# Altium PCB STM32F3_DRV8323RS.PcbDoc (part 2 of 2)
Units mil, origin at the board's own origin, x right, y up, seen from the top; angles counter-clockwise.
Board outline 1929.13 x 1057.48 mil, 4 copper layers (Top Layer, Mid-Layer 1, Mid-Layer 2, Bottom Layer); 100 components, 83 nets, 400 pads, 171 vias.
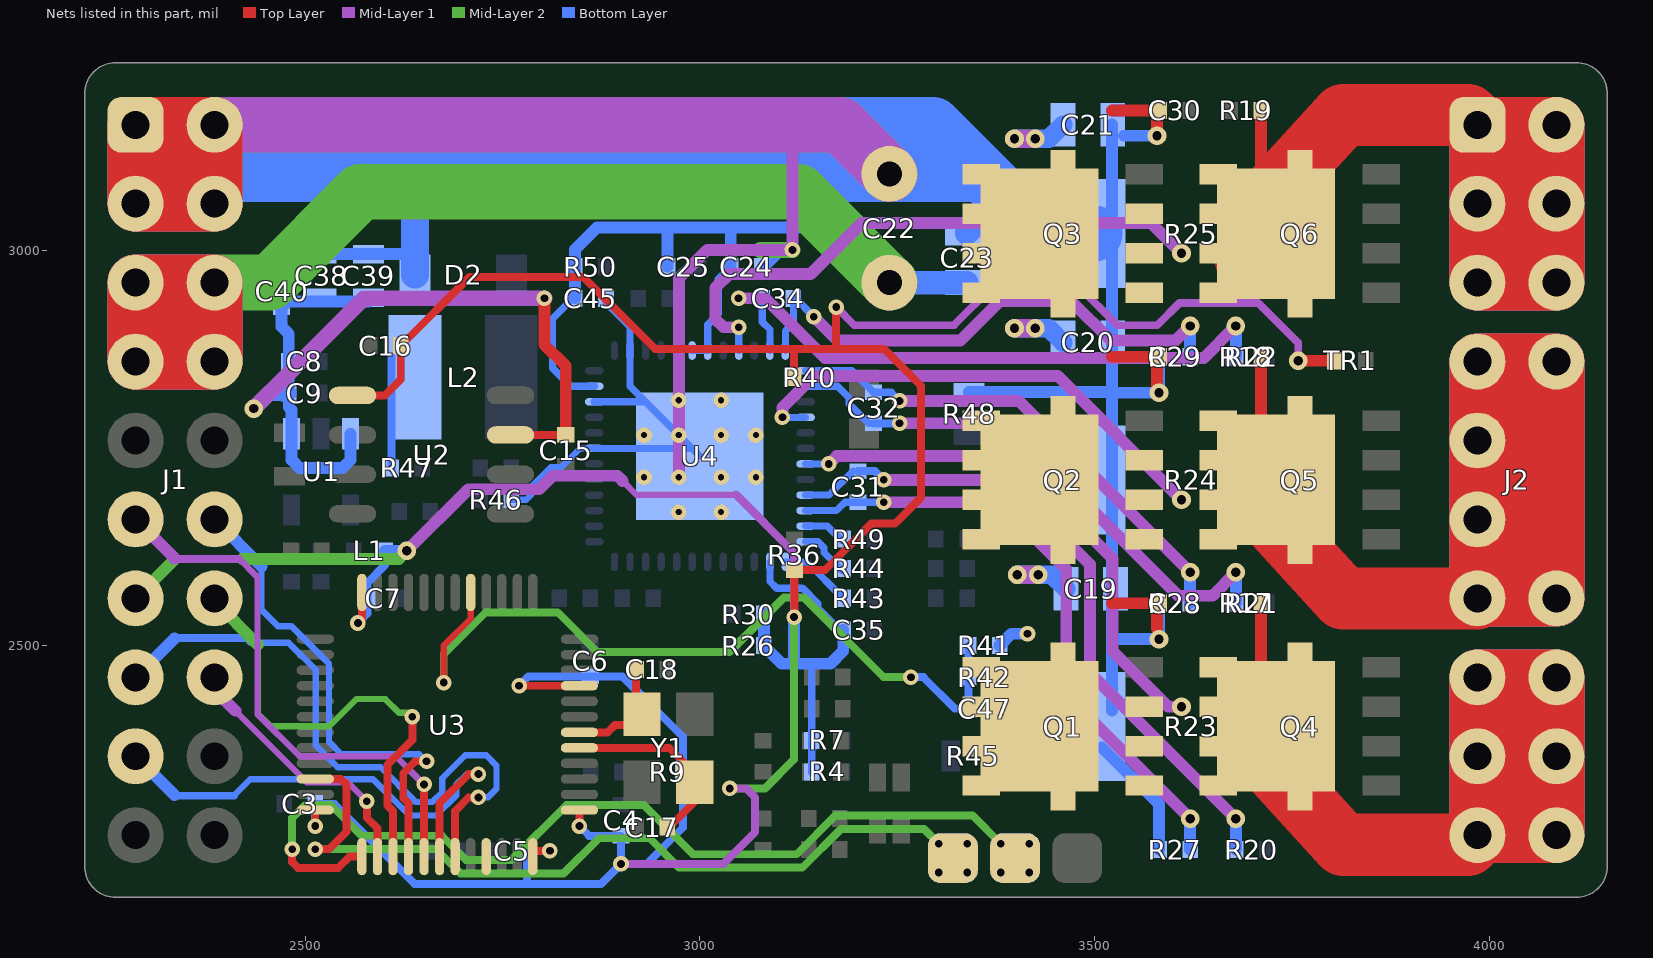
[diagram p4: the nets of this part, all layers, seen from the top]

## Via types
v1: diameter 19.68, hole 9.84, Top Layer to Bottom Layer, tented both sides, 106 vias
v2: diameter 23.62, hole 11.81, Top Layer to Bottom Layer, tented both sides, 53 vias
v3: diameter 19.68, hole 7.87, Top Layer to Bottom Layer, 12 vias

## Nets (pads, with @x,y where several pads share a name; then routed paths per layer and width w, separated by ;. In a path a pad name is that pad's centre, name@x,y a point inside that pad or via, vN(x,y) a via of type N, cw(c..) or ccw(c..) an arc to the next point about the centre after c; other vN are vias at no path point) (continued)
PGND: C19.2 C20.2 C21.2 C22.2 C23.1 C24.1 C28.2 C29.2 C30.2 C38.2 C39.2 C40.1 C45.1 C47.1 D2.1 J1.1 J1.2 J1.3 J1.4 R23.2 R24.2 R25.2 R27.1 R28.1 R29.1 R42.2 R45.2 R46.1 R48.2 U4.2 U4.43 U4.46 U4.49 | length 9507.8
  Top Layer w15: 3522,2553.74 3579,2553.74 3579,2521.59 ; 3522,2865.95 3579,2865.95 v2@3579,2820.45 ; 3522,3178.15 3579,3178.15 v2(3579,3146)
  Top Layer w70.87: J1.1@2285.04,3159.84 J1.3@2285.04,3059.84 J1.4@2385.04,3059.84 ; J1.1@2285.04,3159.84 J1.4@2385.04,3059.84 ; J1.1@2285.04,3159.84 J1.2@2385.04,3159.84 J1.4@2385.04,3059.84
  Mid-Layer 1 w15: v3(2973.29,2713.29) 2973.29,2965.24 3009.38,3001.33 v1(3117.15,3001.33) 3117.15,3150
  Mid-Layer 1 w70.87: C22.2@3240,3097.64 3177.8,3159.84 J1.2@2385.04,3159.84 ; J1.1@2285.04,3159.84 J1.2@2385.04,3159.84 ; J1.1@2285.04,3159.84 J1.4@2385.04,3059.84 ; J1.1@2285.04,3159.84 J1.3@2285.04,3059.84 J1.4@2385.04,3059.84 ; J1.4@2385.04,3059.84 J1.2@2385.04,3159.84
  Mid-Layer 2 w20: 3076.33,3001.33 v1(3117.15,3001.33)
  Mid-Layer 2 w70.87: C22.2@3240,3097.64 3177.8,3159.84 J1.2@2385.04,3159.84 ; J1.1@2285.04,3159.84 J1.2@2385.04,3159.84 ; J1.1@2285.04,3159.84 J1.4@2385.04,3059.84 ; J1.1@2285.04,3159.84 J1.3@2285.04,3059.84 J1.4@2385.04,3059.84 ; J1.4@2385.04,3059.84 J1.2@2385.04,3159.84
  Bottom Layer w8: R46.1@2761,2685 2780,2685 2787,2692 2787,2701.98 2811,2725.97 2824.33,2725.97 2848.2,2749.84 U4.43@2866.14,2749.84
  Bottom Layer w9: U4.43@2866.14,2749.84 U4.49@2990.16,2749.84 ; U4.46@2866.14,2808.9 U4.49@2931.1,2808.9 ; C45.1@2881,2940 2881,2934 2911.42,2903.58 U4.2@2911.42,2873.86 2911.42,2828.58 U4.49@3000,2740
  Bottom Layer w15: C40.1@2470,2968.37 2470,2974 2492,2996 2638.98,2996 ; C24.1@3081,2980 3102.33,3001.33 v1(3117.15,3001.33) ; R48.2@3341,2821.12 3522,2821.12 ; R42.2@3379.68,2460 C47.1@3379.68,2420 R23.2@3477.64,2420 ; R24.2@3472.51,2709.84 R24.2@3502.05,2709.84 ; R23.2@3509.76,2370.89 3581.63,2299.02 R27.1@3581.63,2241.54 ; R23.2@3522,2417.59 C21.2@3522,3160 ; 3522.24,2508.24 v2(3581.63,2508.24) R28.1@3581.63,2553.74 ; 3522.55,2820.45 v2(3581.63,2820.45) R29.1@3581.63,2865.95 ; C21.2@3536.99,3146 v2(3579,3146)
  Bottom Layer w20: R45.2@3373,2360 R23.2@3480.25,2360
  Bottom Layer w30: C23.1@3338.16,3022.84 3379.82,3064.5
  Bottom Layer w35: D2.1@2638.98,2970 2638.98,3090.62
  Bottom Layer w70.87: 2422.84,3097.64 3357.36,3097.64 ; R25.2@3500,3022.05 3432.95,3022.05 3357.36,3097.64 ; J1.1@2285.04,3159.84 J1.2@2385.04,3159.84 ; J1.1@2285.04,3159.84 J1.4@2385.04,3059.84 ; J1.1@2285.04,3159.84 J1.3@2285.04,3059.84 J1.4@2385.04,3059.84 ; J1.4@2385.04,3059.84 J1.2@2385.04,3159.84 ; J1.2@2385.04,3159.84 3295.16,3159.84 3357.36,3097.64
  other v3: 2973.29,2669.13 3026.71,2669.13 2929.13,2713.29 3026.71,2713.29 3070.87,2713.29 2929.13,2766.71 2973.29,2766.71 3026.71,2766.71 3070.87,2766.71 2973.29,2810.87 3026.71,2810.87
PVDD+: C19.1 C20.1 C21.1 C22.1 C23.2 C24.2 C25.2 C45.2 J1.5 J1.6 J1.7 J1.8 Q1.2 Q2.2 Q3.2 R41.1 R50.1 U4.6 U4.7 U4.47 | length 4517.6
  Top Layer w70.87: J1.5@2285.04,2959.84 J1.7@2285.04,2859.84 J1.8@2385.04,2859.84 ; J1.5@2285.04,2959.84 J1.8@2385.04,2859.84 ; J1.5@2285.04,2959.84 J1.6@2385.04,2959.84 J1.8@2385.04,2859.84
  Mid-Layer 1 w23.62: v2(3398.52,2902) v2(3424.84,2902) ; v2(3398.52,3142.09) v2(3424.84,3142.09) ; v2(3402.18,2589.8) v2(3428.5,2589.8)
  Mid-Layer 1 w70.87: J1.5@2285.04,2959.84 J1.6@2385.04,2959.84 J1.8@2385.04,2859.84 ; J1.5@2285.04,2959.84 J1.8@2385.04,2859.84 ; J1.5@2285.04,2959.84 J1.7@2285.04,2859.84 J1.8@2385.04,2859.84
  Mid-Layer 2 w23.62: v2(3398.52,2902) v2(3424.84,2902) ; v2(3398.52,3142.09) v2(3424.84,3142.09) ; v2(3402.18,2589.8) v2(3428.5,2589.8)
  Mid-Layer 2 w70.87: C22.1@3240,2959.84 3124.84,3075 2570,3075 2454.84,2959.84 J1.6@2385.04,2959.84 ; J1.5@2285.04,2959.84 J1.6@2385.04,2959.84 ; J1.5@2285.04,2959.84 J1.8@2385.04,2859.84 ; J1.5@2285.04,2959.84 J1.7@2285.04,2859.84 J1.8@2385.04,2859.84 ; J1.8@2385.04,2859.84 J1.6@2385.04,2959.84
  Bottom Layer w9: C45.2@2839,2940 2813.45,2914.45 2813.45,2851.36 2836.22,2828.58 U4.47@2866.14,2828.58 ; U4.6@2990.16,2873.86 U4.7@3009.84,2873.86 3009.84,2906.46 3023.26,2919.88 3023.26,2964.26 C24.2@3039,2980
  Bottom Layer w15: C45.2@2841.63,2940 2841.63,3001.63 2869.8,3029.8 3170.04,3029.8 C22.1@3240,2959.84 ; C25.2@2959,2980 2959,3028.31 ; C24.2@3039,2980 3039,3029.08 ; R41.1@3379.68,2500 3394.68,2515 v1(3415,2515)
  Bottom Layer w23.62: v2(3398.52,2902) v2(3424.84,2902) 3442.09,2902 C20.1@3460,2884.09 ; v2(3398.52,3142.09) v2(3424.84,3142.09) 3442.09,3142.09 C21.1@3460,3160 ; v2(3402.18,2589.8) v2(3428.5,2589.8) 3445.76,2589.8 C19.1@3463.66,2571.89
  Bottom Layer w30: C22.1@3240,2959.84 C23.2@3338.16,2959.84
  Bottom Layer w70.87: J1.5@2285.04,2959.84 J1.6@2385.04,2959.84 J1.8@2385.04,2859.84 ; J1.5@2285.04,2959.84 J1.8@2385.04,2859.84 ; J1.5@2285.04,2959.84 J1.7@2285.04,2859.84 J1.8@2385.04,2859.84
SENSOR_CLK: J1.14 U3.39 | length 584.1
  Top Layer w10: U3.39@2611.1,2232.68 2611.1,2290.58 2604.22,2297.46 2604.22,2349.09 2635.65,2380.51 v1(2635.65,2409.84)
  Mid-Layer 2 w8: 2440.02,2501.32 2440.02,2413.87 2456.12,2397.77 2530.28,2397.77 2564.8,2432.3 2601.44,2432.3 2618.7,2415.03 2630.45,2415.03 v1(2635.65,2409.84)
  Mid-Layer 2 w15: J1.14@2385.04,2556.3 2440.02,2501.32
SENSOR_CS: J1.16 U3.38 | length 327.1
  Top Layer w10: v1(2578,2302.92) 2578,2281.88 2591.42,2268.47 U3.38@2591.42,2232.68
  Mid-Layer 1 w8: 2411.45,2417.4 2501.82,2327.04 2553.88,2327.04 v1(2578,2302.92)
  Mid-Layer 1 w15: J1.16@2385.04,2443.82 2411.45,2417.4
SENSOR_MISO: J1.12 U3.40 | length 630
  Top Layer w10: U3.40@2630.79,2232.68 2630.79,2300.37 2624.09,2307.07 2624.09,2338.34 2639.21,2353.46 v1(2653.7,2353.46)
  Bottom Layer w8: 2444.48,2600.4 2444.48,2545.65 2465.47,2524.67 2482.56,2524.67 2530.01,2477.22 2530.01,2378.13 2545.57,2362.57 2644.59,2362.57 v1(2653.7,2353.46)
  Bottom Layer w15: J1.12@2385.04,2659.84 2444.48,2600.4
SENSOR_MOSI: J1.11 U3.41 | length 697.2
  Top Layer w10: U3.41@2650.47,2232.68 v1(2650.47,2324.1)
  Mid-Layer 1 w8: 2416.16,2609.84 2439.49,2586.51 2439.49,2413.15 2492.77,2359.87 2614.69,2359.87 v1(2650.47,2324.1)
  Mid-Layer 1 w10: 2334.46,2609.84 2416.16,2609.84
  Mid-Layer 1 w15: J1.11@2285.04,2659.84 2334.46,2610.43
SHA_1: J2.1 J2.2 J2.3 J2.4 J2.5 J2.6 Q3.3 Q6.2 R19.1 U4.9 | length 5122.2
  Top Layer w15: Q6.2@3711,3041.05 R19.1@3711,3178.15
  Top Layer w70.87: J2.3@3985.04,3059.84 J2.6@4085.04,2959.84 ; J2.3@3985.04,3059.84 J2.5@3985.04,2959.84 J2.6@4085.04,2959.84 ; J2.3@3985.04,3059.84 J2.1@3985.04,3159.84 ; J2.3@3985.04,3059.84 J2.4@4085.04,3059.84 ; J2.1@3985.04,3159.84 J2.4@4085.04,3059.84 ; J2.1@3985.04,3159.84 J2.2@4085.04,3159.84 J2.4@4085.04,3059.84 ; J2.6@4085.04,2959.84 J2.4@4085.04,3059.84
  Top Layer w78.74: Q6.2@3692,2988 Q6.2@3701,2988 ; Q6.2@3730,3078.86 3815,3172.05 3972.84,3172.05 J2.1@3985.04,3159.84
  Mid-Layer 1 w15: v1(3049.21,2903.26) 3029.91,2903.26 3019.42,2913.74 3019.42,2953.21 3036.93,2970.72 3140.06,2970.72 3204.67,3035.33 3571.71,3035.33 v2(3610,2997.05)
  Mid-Layer 1 w70.87: J2.3@3985.04,3059.84 J2.4@4085.04,3059.84 ; J2.3@3985.04,3059.84 J2.1@3985.04,3159.84 ; J2.3@3985.04,3059.84 J2.5@3985.04,2959.84 J2.6@4085.04,2959.84 ; J2.3@3985.04,3059.84 J2.6@4085.04,2959.84 ; J2.1@3985.04,3159.84 J2.2@4085.04,3159.84 J2.4@4085.04,3059.84 ; J2.1@3985.04,3159.84 J2.4@4085.04,3059.84 ; J2.6@4085.04,2959.84 J2.4@4085.04,3059.84
  Mid-Layer 2 w70.87: J2.3@3985.04,3059.84 J2.4@4085.04,3059.84 ; J2.3@3985.04,3059.84 J2.1@3985.04,3159.84 ; J2.3@3985.04,3059.84 J2.5@3985.04,2959.84 J2.6@4085.04,2959.84 ; J2.3@3985.04,3059.84 J2.6@4085.04,2959.84 ; J2.1@3985.04,3159.84 J2.2@4085.04,3159.84 J2.4@4085.04,3059.84 ; J2.1@3985.04,3159.84 J2.4@4085.04,3059.84 ; J2.6@4085.04,2959.84 J2.4@4085.04,3059.84
  Bottom Layer w9: U4.9@3049.21,2873.86 v1(3049.21,2903.26)
  Bottom Layer w70.87: J2.3@3985.04,3059.84 J2.4@4085.04,3059.84 ; J2.3@3985.04,3059.84 J2.1@3985.04,3159.84 ; J2.3@3985.04,3059.84 J2.5@3985.04,2959.84 J2.6@4085.04,2959.84 ; J2.3@3985.04,3059.84 J2.6@4085.04,2959.84 ; J2.1@3985.04,3159.84 J2.2@4085.04,3159.84 J2.4@4085.04,3059.84 ; J2.1@3985.04,3159.84 J2.4@4085.04,3059.84 ; J2.6@4085.04,2959.84 J2.4@4085.04,3059.84
SHB_1: J2.7 J2.8 J2.9 J2.11 J2.13 J2.14 Q2.3 Q5.2 R18.1 U4.16 | length 6770.3
  Top Layer w15: Q5.2@3711,2728.84 R18.1@3711,2865.94
  Top Layer w39.37: J2.13@3977.2,2552 J2.13@3985.04,2559.84
  Top Layer w70.87: J2.11@3985.04,2659.84 J2.13@3985.04,2559.84 J2.14@4085.04,2559.84 ; J2.11@3985.04,2659.84 J2.14@4085.04,2559.84 ; J2.11@3985.04,2659.84 4085.04,2659.84 ; J2.11@3985.04,2659.84 J2.9@3985.04,2759.84 ; J2.9@3985.04,2759.84 4085.04,2659.84 ; J2.9@3985.04,2759.84 J2.7@3985.04,2859.84 ; J2.9@3985.04,2759.84 4085.04,2759.84 ; J2.7@3985.04,2859.84 4085.04,2759.84 ; J2.7@3985.04,2859.84 J2.8@4085.04,2859.84 4085.04,2759.84 ; J2.14@4085.04,2559.84 4085.04,2659.84 ; 4085.04,2659.84 4085.04,2759.84
  Top Layer w78.74: Q5.2@3730,2653.03 3815,2559.84 J2.13@3985.04,2559.84
  Mid-Layer 1 w15: v1(3104.46,2789.21) 3104.46,2801.5 3144.75,2841.79 3453.05,2841.79 v2(3610,2684.84)
  Mid-Layer 1 w70.87: J2.11@3985.04,2659.84 J2.9@3985.04,2759.84 ; J2.11@3985.04,2659.84 4085.04,2659.84 ; J2.11@3985.04,2659.84 J2.14@4085.04,2559.84 ; J2.11@3985.04,2659.84 J2.13@3985.04,2559.84 J2.14@4085.04,2559.84 ; J2.9@3985.04,2759.84 4085.04,2759.84 ; J2.9@3985.04,2759.84 J2.7@3985.04,2859.84 ; J2.9@3985.04,2759.84 4085.04,2659.84 ; J2.7@3985.04,2859.84 J2.8@4085.04,2859.84 4085.04,2759.84 ; J2.7@3985.04,2859.84 4085.04,2759.84 ; J2.14@4085.04,2559.84 4085.04,2659.84 ; 4085.04,2659.84 4085.04,2759.84
  Mid-Layer 2 w70.87: J2.11@3985.04,2659.84 J2.9@3985.04,2759.84 ; J2.11@3985.04,2659.84 4085.04,2659.84 ; J2.11@3985.04,2659.84 J2.14@4085.04,2559.84 ; J2.11@3985.04,2659.84 J2.13@3985.04,2559.84 J2.14@4085.04,2559.84 ; J2.9@3985.04,2759.84 4085.04,2759.84 ; J2.9@3985.04,2759.84 J2.7@3985.04,2859.84 ; J2.9@3985.04,2759.84 4085.04,2659.84 ; J2.7@3985.04,2859.84 J2.8@4085.04,2859.84 4085.04,2759.84 ; J2.7@3985.04,2859.84 4085.04,2759.84 ; J2.14@4085.04,2559.84 4085.04,2659.84 ; 4085.04,2659.84 4085.04,2759.84
  Bottom Layer w9: v1(3104.46,2789.21) U4.16@3133.86,2789.21
  Bottom Layer w70.87: J2.11@3985.04,2659.84 J2.9@3985.04,2759.84 ; J2.11@3985.04,2659.84 4085.04,2659.84 ; J2.11@3985.04,2659.84 J2.14@4085.04,2559.84 ; J2.11@3985.04,2659.84 J2.13@3985.04,2559.84 J2.14@4085.04,2559.84 ; J2.9@3985.04,2759.84 4085.04,2759.84 ; J2.9@3985.04,2759.84 J2.7@3985.04,2859.84 ; J2.9@3985.04,2759.84 4085.04,2659.84 ; J2.7@3985.04,2859.84 J2.8@4085.04,2859.84 4085.04,2759.84 ; J2.7@3985.04,2859.84 4085.04,2759.84 ; J2.14@4085.04,2559.84 4085.04,2659.84 ; 4085.04,2659.84 4085.04,2759.84
SHC_1: J2.15 J2.16 J2.17 J2.18 J2.19 J2.20 Q1.3 Q4.2 R17.1 U4.19 | length 4636
  Top Layer w15: Q4.2@3711,2416.64 R17.1@3711,2553.74
  Top Layer w70.87: J2.19@3985.04,2259.84 J2.20@4085.04,2259.84 ; J2.19@3985.04,2274.04 J2.17@3985.04,2359.84 ; J2.18@4085.04,2359.84 J2.15@3985.04,2459.84 ; J2.17@3985.04,2359.84 J2.15@3985.04,2459.84 ; J2.17@3985.04,2359.84 J2.20@4085.04,2259.84 ; J2.15@3985.04,2459.84 J2.16@4085.04,2459.84 J2.20@4085.04,2259.84
  Top Layer w78.74: Q4.2@3730,2340.83 3815,2247.64 3972.84,2247.64 J2.19@3985.04,2259.84
  Mid-Layer 1 w15: v1(3163.26,2730.16) 3173.18,2740.08 3392.92,2740.08 3522.89,2610.11 3522.89,2492.78 3593.03,2422.64 v2(3610,2422.64)
  Mid-Layer 1 w70.87: J2.18@4085.04,2359.84 J2.15@3985.04,2459.84 ; J2.17@3985.04,2359.84 J2.19@3985.04,2259.84 J2.20@4085.04,2259.84 ; J2.17@3985.04,2359.84 J2.20@4085.04,2259.84 ; J2.17@3985.04,2359.84 J2.15@3985.04,2459.84 ; J2.15@3985.04,2459.84 J2.16@4085.04,2459.84 J2.20@4085.04,2259.84
  Mid-Layer 2 w70.87: J2.18@4085.04,2359.84 J2.15@3985.04,2459.84 ; J2.17@3985.04,2359.84 J2.19@3985.04,2259.84 J2.20@4085.04,2259.84 ; J2.17@3985.04,2359.84 J2.20@4085.04,2259.84 ; J2.17@3985.04,2359.84 J2.15@3985.04,2459.84 ; J2.15@3985.04,2459.84 J2.16@4085.04,2459.84 J2.20@4085.04,2259.84
  Bottom Layer w9: U4.19@3133.86,2730.16 v1(3163.26,2730.16)
  Bottom Layer w70.87: J2.18@4085.04,2359.84 J2.15@3985.04,2459.84 ; J2.17@3985.04,2359.84 J2.19@3985.04,2259.84 J2.20@4085.04,2259.84 ; J2.17@3985.04,2359.84 J2.20@4085.04,2259.84 ; J2.17@3985.04,2359.84 J2.15@3985.04,2459.84 ; J2.15@3985.04,2459.84 J2.16@4085.04,2459.84 J2.20@4085.04,2259.84
SNA_1: C34.1 R29.2 U4.12 | length 680.9
  Mid-Layer 1 w15: v1(3144.28,2916.72) 3174.65,2886.35 3329.77,2886.35 3379.94,2936.53 3470.68,2936.53 3520.86,2886.35 3602.35,2886.35 v2(3621,2905)
  Bottom Layer w9: U4.12@3108.27,2873.86 3108.27,2898.8 3118.37,2908.91 C34.1@3118.37,2940 ; C34.1@3121,2940 v1(3144.28,2916.72)
  Bottom Layer w15: R29.2@3621,2865.95 v2(3621,2905)
SNB_1: C32.1 R28.2 U4.13 | length 632
  Mid-Layer 1 w15: v1(3252.87,2810) 3403.8,2810 v2(3621,2592.79)
  Bottom Layer w9: U4.13@3133.86,2848.27 3192.73,2848.27 C32.1@3220,2821
  Bottom Layer w10: C32.1@3220,2821 3241.87,2821 v1(3252.87,2810)
  Bottom Layer w15: R28.2@3621,2553.74 v2(3621,2592.79)
SNC_1: C31.1 R27.2 U4.22 | length 790.1
  Mid-Layer 1 w15: v1(3232.87,2681.63) 3379.37,2681.63 3464,2597 3464,2437.59 v2(3621,2280.59)
  Bottom Layer w9: U4.22@3133.86,2671.1 3173.1,2671.1 3183.63,2681.63 C31.1@3200,2681.63
  Bottom Layer w10: C31.1@3200,2681.63 v1(3232.87,2681.63)
  Bottom Layer w15: R27.2@3621,2241.54 v2(3621,2280.59)
SOA_1: R43.2 U4.25 | length 92.5
  Bottom Layer w9: U4.25@3108.27,2606.14 3135.49,2606.14 R43.2@3181.63,2560
SOB_1: R44.2 U4.24 | length 64.3
  Bottom Layer w9: U4.24@3133.86,2631.73 3149.27,2631.73 3157,2624 3157,2618 R44.2@3179.57,2595.43
SOC_1: R49.2 U4.23 | length 53.4
  Bottom Layer w9: U4.23@3133.86,2651.42 3161.28,2651.42 R49.2@3179.66,2633.03
SPA_1: C34.2 R22.2 U4.11 | length 817.3
  Mid-Layer 1 w15: v1(3049,2940) 3082.86,2940 3158.51,2864.35 3638.35,2864.35 v2(3679,2905)
  Bottom Layer w9: v1(3049,2940) C34.2@3079,2940 3079,2910.07 3088.58,2900.48 U4.11@3088.58,2873.86
  Bottom Layer w15: R22.2@3679,2865.95 v2(3679,2905)
SPB_1: C32.2 R21.2 U4.14 | length 711
  Mid-Layer 1 w15: v1(3252.87,2781.63) 3387.37,2781.63 3605.8,2563.2 3649.4,2563.2 v2(3679,2592.79)
  Bottom Layer w9: U4.14@3133.86,2828.58 3174.22,2828.58 3189.08,2813.71 3189.08,2805.92 3213.37,2781.63 C32.2@3220,2781.63
  Bottom Layer w10: C32.2@3220,2781.63 v1(3252.87,2781.63)
  Bottom Layer w15: R21.2@3679,2553.74 v2(3679,2592.79)
SPC_1: C31.2 R20.2 U4.21 | length 853.5
  Mid-Layer 1 w15: v1(3232.87,2710) 3387,2710 3494,2603 3494,2465.59 v2(3679,2280.59)
  Bottom Layer w9: U4.21@3133.86,2690.79 3163.61,2690.79 C31.2@3193.82,2721
  Bottom Layer w10: C31.2@3200,2721 3221.87,2721 v1(3232.87,2710)
  Bottom Layer w15: R20.2@3679,2241.54 v2(3679,2280.59)
SWCLK: pad.0@3399.22,2230.8 U3.37 | length 1176.3
  Top Layer w10: v1(2483.43,2242.11) 2483.43,2225.8 2490.76,2218.47 2541.77,2218.47 2555.98,2232.68 U3.37@2571.73,2232.68
  Mid-Layer 2 w10: v1(2483.43,2242.11) 2483.43,2281.59 2500.16,2298.32 2532.16,2298.32 2571.37,2259.11 2673.04,2259.11 2703.87,2228.28 2761.35,2228.28 2830.91,2297.85 2929.15,2297.85 2991.25,2235.75 3122.57,2235.75 3171.56,2284.74 3345.53,2284.74 v1(3381.15,2249.13)
  other v1: 3381.15,2212.47 3417.29,2212.47 3417.29,2249.13
SWDIO: pad.0@3320.48,2230.8 U3.34 | length 1015.8
  Top Layer w10: v1(2512.68,2242.11) 2530.1,2242.11 2552.15,2264.16 2552.15,2323.99 2545.04,2331.1 U3.34@2512.68,2331.1
  Top Layer w20: pad.0@3302.41,2248.61 v1(3302.41,2249.13)
  Mid-Layer 2 w10: v1(2512.68,2242.11) 2666,2242.11 2696.83,2211.28 2827.28,2211.28 2872,2256 2936.28,2256 2973.55,2218.74 3129.6,2218.74 3178.6,2267.74 3283.79,2267.74 v1(3302.41,2249.13)
  other v1: 3302.41,2212.47 3338.55,2212.47 3338.55,2249.13
USART1_RX: J1.15 U3.43 | length 811.4
  Top Layer w10: U3.43@2689.84,2232.68 2689.84,2290.58 2707.02,2307.76 v1(2719.37,2307.76)
  Bottom Layer w8: 2424.46,2509.85 2430.58,2503.72 2478.71,2503.72 2513.13,2469.3 2513.13,2373.8 2540.93,2346 2595.45,2346 2639.62,2301.83 2661.09,2301.83 2673.68,2314.42 2673.68,2331.86 2702.86,2361.04 2729.21,2361.04 2742.29,2347.95 2742.29,2318.49 2731.56,2307.76 v1(2719.37,2307.76)
  Bottom Layer w10: 2334.46,2509.85 2424.46,2509.85
  Bottom Layer w15: J1.15@2285.04,2459.84 2334.46,2509.26
USART1_TX: J1.17 U3.42 | length 644.4
  Top Layer w10: U3.42@2670.16,2232.68 2670.16,2300.37 2706.99,2337.2 v1(2719.37,2337.2)
  Bottom Layer w8: 2409.58,2309.84 2430.39,2330.66 2585.82,2330.66 2631.61,2284.88 2666.03,2284.88 2691.53,2310.37 2691.53,2324.31 2704.42,2337.2 v1(2719.37,2337.2)
  Bottom Layer w10: 2334.46,2309.84 2409.58,2309.84
  Bottom Layer w15: J1.17@2285.04,2359.84 2334.46,2310.43
VCC3.3V: C3.1 C4.1 C5.1 C6.1 C7.2 C16.2 C35.2 J1.13 L1.2 R4.2 R7.2 R9.1 R26.2 R30.2 R36.2 R40.2 TR1.2 U2.5 U3.1 U3.9 U3.24 U3.36 U3.48 U4.26 | length 5570
  Top Layer w10: v1(2512.68,2271.36) U3.36@2512.68,2291.73 ; U2.5@2560,2817 2600.86,2817 2621,2837.14 C16.2@2621,2880 2708,2967 2852,2967 2943,2876 3233.2,2876 3280.12,2829.07 3280.12,2687.51 3247.31,2654.7 3217.31,2654.7 3158.26,2595.65 R36.2@3119.72,2595.65 v1@3119.72,2536.6 ; v1@2571.73,2533.6 U3.24@2571.73,2567.32 ; v1(2770.81,2449.21) U3.9@2847.32,2449.21 ; U3.48@2788,2240 v1(2810,2240) ; v1(2847.32,2271.36) U3.1@2847.32,2291.73 ; R40.2@3119,2840 3119,2876 ; 3172.56,2876 v1(3172.56,2928.92)
  Top Layer w15: v2(3758,2860.95) TR1.2@3804,2860.95
  Mid-Layer 1 w8: 2902.1,2708.58 2919.36,2691.32 3045.74,2691.32
  Mid-Layer 1 w10: v1(2900,2223.47) 3029.47,2223.47 3070,2264 3070,2307.66 3058.61,2319.06 v1(3037.68,2319.06) ; 3045.74,2691.32 3119.27,2617.8 v1(3119.27,2536.15) ; v1(3172.56,2928.92) 3195.63,2905.85 3321.69,2905.85 3371.87,2956.03 3478.76,2956.03 3528.93,2905.85 3579.38,2905.85 3607.63,2934.1 3707.22,2934.1 3758,2883.32 v2(3758,2860.95)
  Mid-Layer 1 w15: v2(2628.75,2620) 2706.79,2698.04 2796.28,2698.04 2813.49,2715.25 2895.43,2715.25 2902.1,2708.58
  Mid-Layer 2 w10: 2334.46,2609.85 2420.38,2609.85 ; v1(3037.68,2319.06) 3082.38,2319.06 3119.27,2355.95 v1(3119.27,2536.15)
  Mid-Layer 2 w15: J1.13@2285.04,2559.84 2334.46,2609.26 ; 2420.38,2609.85 2618.59,2609.85 v2(2628.75,2620)
  Bottom Layer w9: U4.26@3088.58,2606.14 3088.58,2581.38 3097.33,2572.64 3130.18,2572.64 3149.3,2553.52 3149.3,2547.7 C35.2@3179.32,2517.68
  Bottom Layer w10: v1(2512.68,2271.36) C3.1@2512.68,2299.68 2536.87,2299.68 2638.55,2198 2874.53,2198 v1(2900,2223.47) 2932.47,2223.47 2978.37,2269.37 2978.37,2384.49 2901.86,2461 2782.6,2461 v1(2770.81,2449.21) ; v1(2566.77,2528.64) 2579,2540.87 C7.2@2579,2560 2579,2580.11 2601,2602.11 L1.2@2601,2620 ; 2781,2198 C5.1@2781,2240 v1@2808,2240 ; v1(2847.32,2271.36) 2859.68,2259 C4.1@2900,2259 2900,2234.65 v1@2900,2224.47 ; R4.2@3141.63,2340 3141.63,2476.74
  Bottom Layer w15: L1.2@2601,2620 v2(2628.75,2620) ; R30.2@3081,2540 R26.2@3081,2500 3103.89,2477.11 3165.41,2477.11 3181.63,2493.33 C35.2@3181.63,2520 ; 3119.27,2479.33 v1(3119.27,2536.15)
VCC5.0: C8.1 C9.1 C15.1 C38.1 C39.1 C40.2 L2.2 R47.2 U1.1 U1.3 U2.3 | length 1302.3
  Top Layer w10: U2.3@2760,2767 C15.1@2830,2767
  Top Layer w15: v1(2803,2940) 2803,2881.32 2830,2854.32 C15.1@2830,2767
  Mid-Layer 1 w20: v2(2434.65,2800.31) 2574.34,2940 v1(2803,2940)
  Bottom Layer w10: R47.2@2609,2725 L2.2@2609,2866.19
  Bottom Layer w15: U1.3@2557.4,2768.43 2557.4,2735.28 2547.12,2725 2492.88,2725 2482.6,2735.28 U1.1@2482.6,2768.43 2482.6,2798.4 2479,2802 C9.1@2479,2820 C8.1@2479,2860 2479,2895 2470,2904 C40.2@2470,2929 2476.88,2935.88 C39.1@2580,2935.88
  Bottom Layer w20: v2(2434.65,2800.31) 2454.34,2820 C9.1@2479,2820
VOLTAGE_ADC: C47.2 R41.2 R42.1 U3.17 | length 1038.7
  Top Layer w8: v1(2675.47,2453.16) 2675.47,2500.17 2709.53,2534.23 U3.17@2709.53,2567.32
  Mid-Layer 2 w10: v1(2675.47,2453.16) 2675.47,2489.1 2728.5,2542.13 2819.76,2542.13 2869.86,2492.03 3037.52,2492.03 3106.37,2560.88 3131.86,2560.88 3232.74,2460 v1(3267.29,2460)
  Bottom Layer w10: v1(3267.29,2460) 3283,2460 3323,2420 C47.2@3340.32,2420 R41.2@3340.32,2500
WS2812_PWM: U3.45
YI: C17.1 U3.5 Y1.1 | length 229.7
  Top Layer w10: U3.5@2847.32,2370.47 2960.97,2370.47 Y1.1@2993.46,2337.98 ; C17.1@2961,2270 2993.46,2302.46 Y1.1@2993.46,2326.69
YO: C18.1 U3.6 Y1.3 | length 118.3
  Top Layer w10: U3.6@2847.32,2390.16 2883.18,2390.16 2892.43,2399.41 Y1.3@2912.64,2399.41 ; Y1.3@2919,2420.84 C18.1@2919,2470
pads on no net: U3.13 U3.18 U3.19 U3.21 U3.22 U3.46

## Polygon pours and split planes (outlines as drawn)
DGND on Top Layer "Top Layer-No Net" (hatched 90Degree grid 20 track 8, pour order 1001): 2225,3240 3505.04,3240 3505.04,2185 3510,2180 2225,2180 2225,3240
SHB_1 on Top Layer "Top Layer-No Net" (solid, remove dead copper, pour order 1005): 3923.31,2590.31 3975.31,2642.31 3975.31,2568.31 3899.31,2568.31 3901.31,2568.31 3923.31,2590.31
C_AND_1 on Top Layer "Top Layer-No Net" (solid, remove dead copper, pour order 1004): 3835,2440.59 3915,2440.59 3925,2430.59 3930,2425.59 3930,2315.59 3915,2300.59 3835,2300.59 3835,2440.59
B_AND_1 on Top Layer "Top Layer-No Net" (solid, remove dead copper, pour order 1003): 3835,2752.8 3915,2752.8 3925,2742.8 3930,2737.8 3930,2627.8 3915,2612.8 3835,2612.8 3835,2752.8
A_AND_1 on Top Layer "Top Layer-No Net" (solid, remove dead copper, pour order 1002): 3835,3065 3915,3065 3925,3055 3930,3050 3930,2940 3915,2925 3835,2925 3835,3065
SHA_1 on Top Layer "Top Layer-No Net" (solid, remove dead copper, pour order 1001): 3920,3124.69 3972,3072.69 3972,3146.69 3896,3146.69 3898,3146.69 3920,3124.69
SHC_1 on Top Layer "Top Layer-No Net" (solid, remove dead copper, pour order 1000): 3929,2281 3981,2333 3981,2259 3905,2259 3907,2259 3929,2281
PGND on Top Layer "Top Layer-No Net" (solid, remove dead copper, pour order 1000): 3515,3238.58 3516.42,3240 4145,3240 4145,2180 4143.9,2181.1 3515,2181.1 3515,3238.58
PVDD+ on Top Layer "Bottom Layer-No Net" (solid, remove dead copper, pour order 1000): 2375,2995 2420.2,2995 2420.29,2995 2440.29,3015 2440,3015.29 2440,3239 3505,3239 3505,2290 3305,2290 3305,2545 3305,2820 3305,2842 3288,2842 3175,2955 3145,2985 2685,2985 2525,2825 2375,2825 2375,2995
C_AND_1 on Bottom Layer "Bottom Layer-No Net" (solid, remove dead copper, pour order 1002): 3835,2440.59 3845,2440.59 3845,2300.59 3835,2300.59 3815,2320.59 3775,2320.59 3774,2320.59 3765,2329.59 3765,2465.59 3770,2470.59 3805,2470.59 3835,2440.59
B_AND_1 on Bottom Layer "Bottom Layer-No Net" (solid, remove dead copper, pour order 1001): 3835,2752.8 3845,2752.8 3845,2612.8 3835,2612.8 3815,2632.8 3775,2632.8 3774,2632.8 3765,2641.8 3765,2777.8 3770,2782.8 3805,2782.8 3835,2752.8
A_AND_1 on Bottom Layer "Bottom Layer-No Net" (solid, remove dead copper, pour order 1000): 3835,3065 3845,3065 3845,2925 3835,2925 3815,2945 3775,2945 3774,2945 3765,2954 3765,3090 3770,3095 3805,3095 3835,3065
PVDD+ on Bottom Layer "Top Layer-No Net" (solid, remove dead copper, pour order 1015): 2220,2995 2425,2995 2425,2835 2415,2825 2220,2825 2220,2995
A_AND_1 on Bottom Layer "Top Layer-No Net" (solid, remove dead copper, pour order 1009): 3835,3065 3915,3065 3925,3055 3930,3050 3930,2940 3915,2925 3835,2925 3835,3065
B_AND_1 on Bottom Layer "Top Layer-No Net" (solid, remove dead copper, pour order 1008): 3835,2752.8 3915,2752.8 3925,2742.8 3930,2737.8 3930,2627.8 3915,2612.8 3835,2612.8 3835,2752.8
C_AND_1 on Bottom Layer "Top Layer-No Net" (solid, remove dead copper, pour order 1007): 3835,2440.59 3915,2440.59 3925,2430.59 3930,2425.59 3930,2315.59 3915,2300.59 3835,2300.59 3835,2440.59
NetC36_1 on Bottom Layer "Top Layer-No Net" (solid, remove dead copper, pour order 1000): 2789,2830 2815,2830 2843,2830 2880,2793 2880,2786 2880,2785 2875,2780 2789,2780 2789,2830
VCC5.0 on Bottom Layer "Top Layer-No Net" (solid, remove dead copper, pour order 1001): 2551,2948 2619,2948 2650,2917 2650,2864 2557,2864 2551,2870 2551,2948
PGND on Bottom Layer "Keep-Out Layer-No Net" (solid, remove dead copper, pour order 1001): 2225,3025 3200,3025 3315,2910 3315,2180 4150,2180 4150,3240 2225,3240 2225,3025
DGND on Bottom Layer "Top Layer-No Net" (hatched 90Degree grid 20 track 8, pour order 1001): 2225,3240 3505.04,3240 3505.04,2185 3510,2180 2225,2180 2225,3240
PGND on Mid-Layer 1 "Top Layer-No Net" (solid, remove dead copper, pour order 1003): 2900,3125 2900,2675 2925,2650 3075,2650 3100,2675 3100,3001.33 3117.15,3001.33 3117.15,3125 2900,3125
PGND on Mid-Layer 1 "Top Layer-No Net" (solid, remove dead copper, pour order 1000): 3515,3238.58 3516.42,3240 4145,3240 4145,2180 4143.9,2181.1 3515,2181.1 3515,3238.58
DGND on Mid-Layer 1 "Top Layer-No Net" (hatched 45Degree grid 20 track 8, pour order 1001): 2225,3240 3505.04,3240 3505.04,2185 3510,2180 2225,2180 2225,3240
PGND on Mid-Layer 2 "Top Layer-No Net" (solid, remove dead copper, pour order 1005): 2900,3040 2900,2725 2900,2675 2925,2650 3075,2650 3085,2660 3100,2675 3100,3040 2900,3040
PGND on Mid-Layer 2 "Top Layer-No Net" (solid, remove dead copper, pour order 1000): 3515,3238.58 3516.42,3240 4145,3240 4145,2180 4143.9,2181.1 3515,2181.1 3515,3238.58
DGND on Mid-Layer 2 "Top Layer-No Net" (hatched 45Degree grid 20 track 8, pour order 1001): 2225,3240 3505.04,3240 3505.04,2185 3510,2180 2225,2180 2225,3240

## Keep-outs
Keep-Out Layer:
  the board outline again, w5

## Other copper
Top Layer:
  rectangle net SHA_1: 3539,2934.33 3674,3059.84
  rectangle net SHC_1: 3539,2309.92 3674,2435.43
  rectangle net SHB_1: 3539,2622.12 3674,2747.64

## Silkscreen, mask and mechanical layers (free items; w line width, h text height)
Top Overlay:
  lines w10: 2263,2809.84 2403.79,2809.84 ; 2263,3009.84 2403.79,3009.84 ; 3966.29,2209.84 4096.01,2209.84 ccw(c4096.01,2249.21) 4135.38,2249.21 4135.38,2470.48 ccw(c4096.01,2470.48) 4096.01,2509.85 ; 3966.29,2509.85 4096.01,2509.85 ; 3966.29,2909.84 4096.01,2909.84 ; 3966.29,3209.85 4096.01,3209.85 cw(c4096.01,3170.48) 4135.38,3170.48 4135.38,2949.21 cw(c4096.01,2949.21) 4096.01,2909.84 ; 4096.01,2619.66 cw(c4096.01,2580.29) 4135.38,2580.29 4135.38,2549.22 cw(c4096.01,2549.22) 4096.01,2509.85 ; 4096.01,2800.03 ccw(c4096.01,2839.4) 4135.38,2839.4 4135.38,2870.47 ccw(c4096.01,2870.47) 4096.01,2909.84 ; 2234.7,2249.21 ccw(c2274.07,2249.21) 2274.07,2209.84 2396.01,2209.84 ccw(c2396.01,2249.21) 2435.38,2249.21 2435.38,2770.48 ccw(c2396.01,2770.48) 2396.01,2809.85 ccw(c2396.01,2849.21) 2435.38,2849.21 2435.38,2970.48 ccw(c2396.01,2970.48) 2396.01,3009.85 ccw(c2396.01,3049.21) 2435.38,3049.21 2435.38,3170.48 ccw(c2396.01,3170.48) 2396.01,3209.85 2274.07,3209.85 ccw(c2274.07,3170.48) 2234.7,3170.48 2234.7,3049.21 ccw(c2274.07,3049.21) 2274.07,3009.84 ccw(c2274.07,2970.48) 2234.7,2970.48 2234.7,2849.21 ccw(c2274.07,2849.21) 2274.07,2809.84 ccw(c2274.07,2770.48) 2234.7,2770.48 2234.7,2249.21
  lines w20: 2321.05,2895.85 2349.03,2923.83 ; 2321.05,2923.83 2349.03,2895.85 ; 2321.05,3095.85 2349.03,3123.83 ; 2321.05,3123.83 2349.03,3095.85 ; 4021.05,2295.85 4049.03,2323.83 ; 4021.05,2323.83 4049.03,2295.85 ; 4021.05,2395.85 4049.03,2423.83 ; 4021.05,2423.83 4049.03,2395.85 ; 4021.05,2595.85 4035.04,2609.84 ; 4021.05,2623.83 4049.03,2595.85 ; 4021.05,2795.85 4049.03,2823.83 ; 4021.05,2823.83 4035.04,2809.84 ; 4021.05,2995.85 4049.03,3023.83 ; 4021.05,3023.83 4049.03,2995.85 ; 4021.05,3095.85 4049.03,3123.83 ; 4021.05,3123.83 4049.03,3095.85 ; 4096.01,2619.66 4066.05,2619.66 4044.56,2641.15 4044.56,2778.54 4066.05,2800.03 4096.01,2800.03
  text "12-24V" at 2550,3220 h50 r270
  text "GND" at 2455,3190 h60 r270
  text "VCC" at 2455,2995 h60 r270
  text "U" at 3906.79,2975.75 h50
  text "FanFan" at 2913,2850 h60 r270
  text "V" at 3906.79,2675 h50
  text "W" at 3906.79,2385 h50
  text "D.C.G" at 3529,2207 h36
  text "V1.3" at 2862,2202 h40
Bottom Overlay:
  lines w8: 2865,2886.65 2853.35,2875 2853.35,2864.02 2875.98,2886.65
  text "-" at 3270.65,3185.87 h61 r90
  text "FanFan" at 2761,3123 h50
  text "+" at 3260.62,2861.57 h61
  text "Professional Bug Coder" at 3299,2410 h38
  text "D" at 3332.52,2275 h36
  text "C" at 3411.26,2275 h36
  text "G" at 3490,2275 h36
Top Paste:
  lines w39.37: 3730,2340.83 3831.03,2239.79 3950.79,2239.79 3985.04,2274.04 ; 3730,2653.03 3831.03,2552 3977.2,2552 ; 3730,3078.86 3831.03,3179.89 3945.11,3179.89 3965.16,3159.84
Top Solder:
  lines w39.37: 3730,2340.83 3831.03,2239.79 3950.79,2239.79 3985.04,2274.04 ; 3730,2653.03 3831.03,2552 3977.2,2552 ; 3730,3078.86 3831.03,3179.89 3945.11,3179.89 3965.16,3159.84

## Text inside footprints (layer, text, board x,y; h text height)
C22: Top Overlay "+" at 3210,2871.26 h61 r270; Top Overlay "-" at 3210,3186.22 h61 r270